# EAGLE board motor_controller_1.0 (EAGLE 9.6.2)
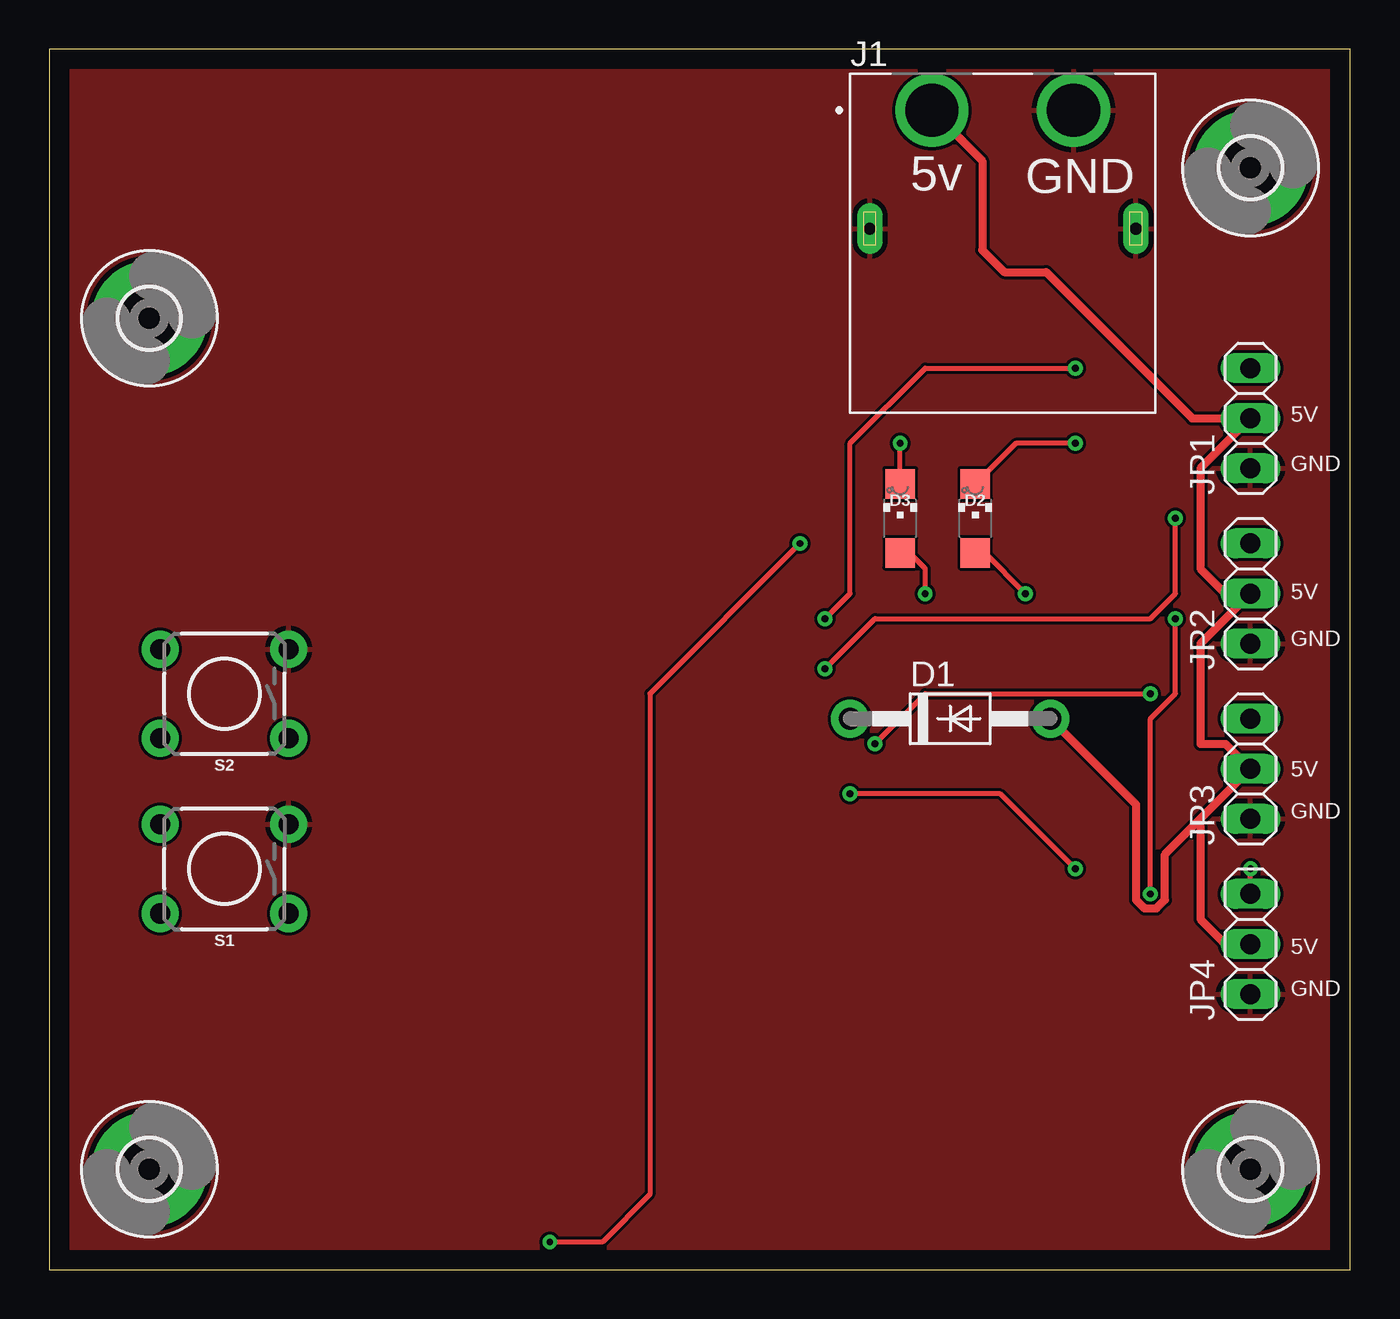
[diagram p0: board, top side]
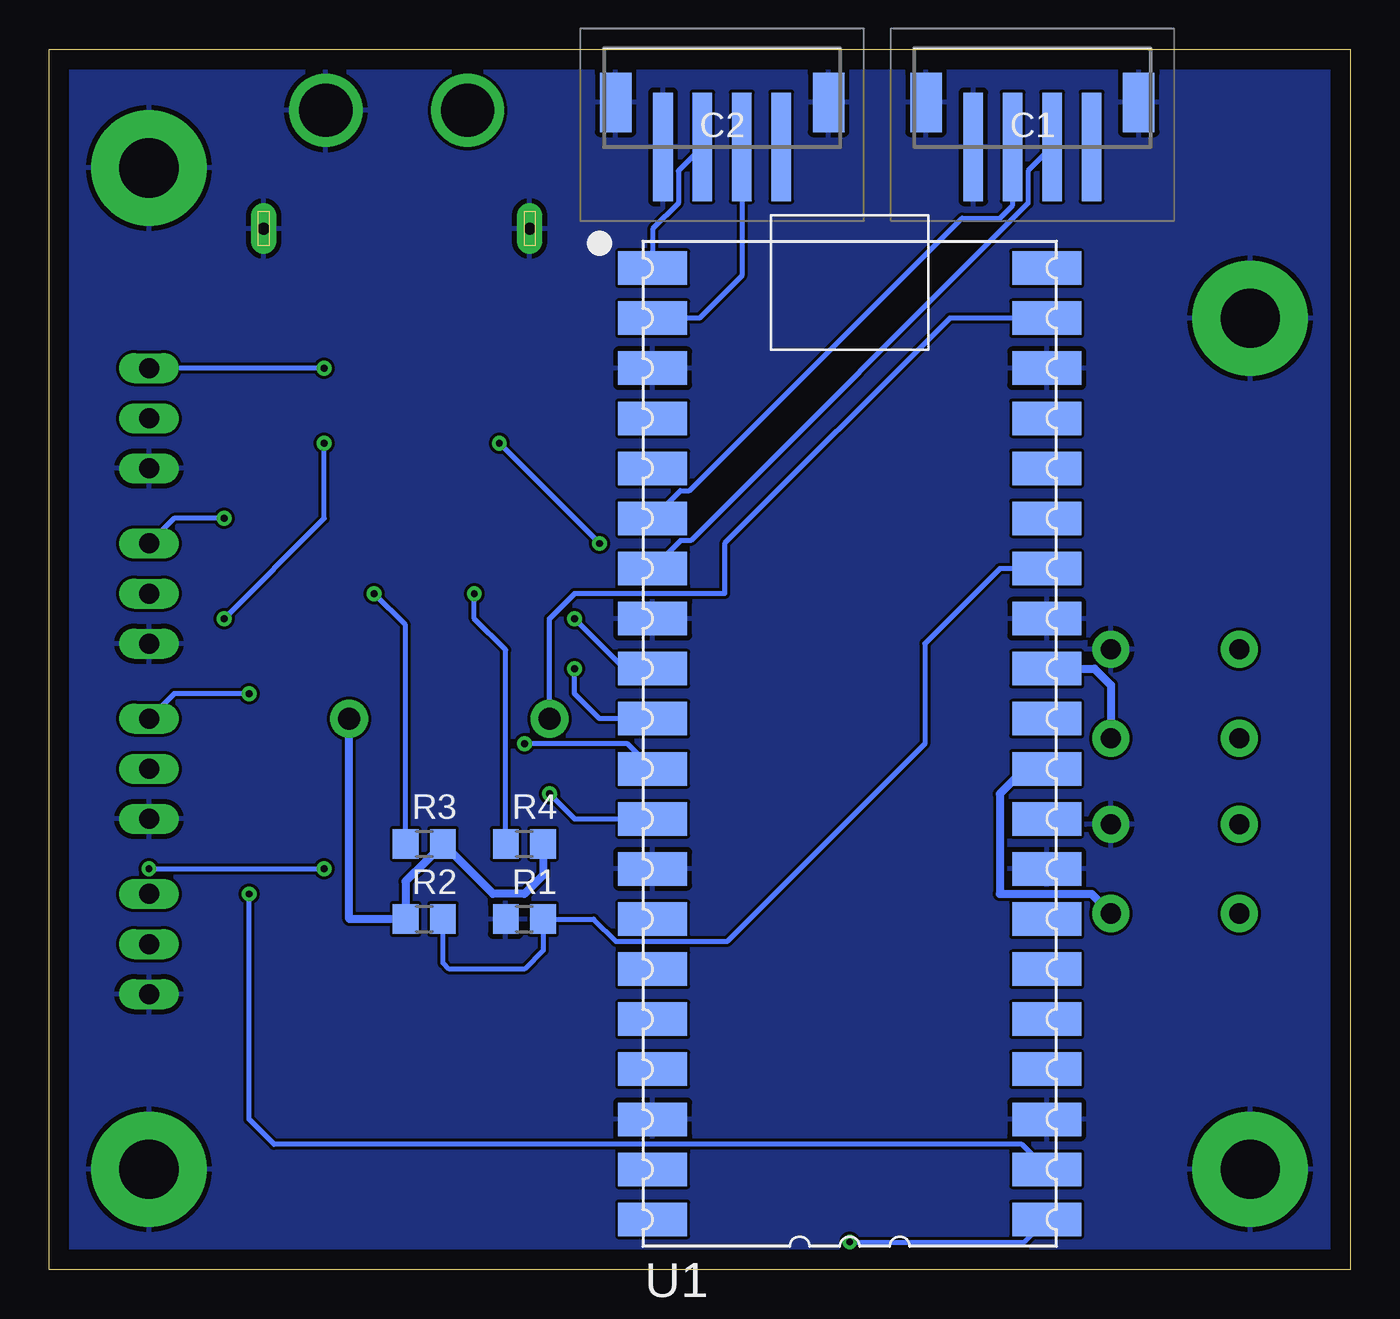
[diagram p1: board, bottom side, seen from below]

Size 66.02 x 61.9 mm. Coordinates in mm from the lower left corner, seen from the top.
Outline: 0,0 66.02,0 66.02,61.9 0,61.9 0,0
Copper layers (1*16): Top 0.035mm / dielectric 1.5mm / Bottom 0.035mm
Design rules "default": minimum track width 6mil, minimum drill 0.35mm, track to track 6mil, track to pad 6mil, pad to pad 6mil, via to via 6mil, smd to smd 6mil, copper to edge 40mil, drill to drill 6mil, minimum pad ring 10mil, minimum via ring 8mil, stop-mask expansion 4mil, vias tented up to drill 0mil, thermal gap 10mil

## Footprints (pad centres in the part's own frame; a part is rotated, then mirrored left to right if it is on the bottom)
4392 = smd 1 x 5.5: 1 3,3.5; 2 1,3.5; 3 -1,3.5; 4 -3,3.5 | smd 1.6 x 3: MP1 5.4,1.25; MP2 -5.4,1.25
DO41-10 = drill 1.118 pad 1.93: A 5.08,0; C -5.08,0
CHIPLED_1206 = smd 1.5 x 1.5: A 0,-1.75; C 0,1.75
3,0-PAD = drill 3 pad 5.842: B3,0 0,0
AMASS_XT60PW-F = drill 2.7: 1 -3.6,0; 2 3.6,0 | drill 0.6 pad 1.3 long: S1 -6.75,-6; S2 6.75,-6
1X03 = drill 1.016 long: 1 -2.54,0; 2 0,0; 3 2.54,0
R0805 = smd 1.3 x 1.5: 1 -0.95,0; 2 0.95,0
TACTILE_SWITCH_PTH_6.0MM = drill 1.016 pad 1.88: 1 -3.251,2.261; 2 3.251,2.261; 3 -3.251,-2.261; 4 3.251,-2.261
PICO-PKG-NO_DEBUG = smd 3.5 x 1.7: P$1 -8.73,25.4; P$2 -8.73,22.86; P$3 -8.73,20.32; P$4 -8.73,17.78; P$5 -8.73,15.24; P$6 -8.73,12.7; P$7 -8.73,10.16; P$8 -8.73,7.62; P$9 -8.73,5.08; P$10 -8.73,2.54; P$11 -8.73,0; P$12 -8.73,-2.54; P$13 -8.73,-5.08; P$14 -8.73,-7.62; P$15 -8.73,-10.16; P$16 -8.73,-12.7; P$17 -8.73,-15.24; P$18 -8.73,-17.78; P$19 -8.73,-20.32; P$20 -8.73,-22.86; P$21 11.27,-22.86; P$22 11.27,-20.32; P$23 11.27,-17.78; P$24 11.27,-15.24; P$25 11.27,-12.7; P$26 11.27,-10.16; P$27 11.27,-7.62; P$28 11.27,-5.08; P$29 11.27,-2.54; P$30 11.27,0; P$31 11.27,2.54; P$32 11.27,5.08; P$33 11.27,7.62; P$34 11.27,10.16; P$35 11.27,12.7; P$36 11.27,15.24; P$37 11.27,17.78; P$38 11.27,20.32; P$39 11.27,22.86; P$40 11.27,25.4

## Placement (x,y rotation side)
C1  4392  [4392]  16.13,60.45 180 bottom
C2  4392  [4392]  31.88,60.45 180 bottom
D1  1N4004  [DO41-10]  45.72,27.94 0 top
D2  [CHIPLED_1206]  46.99,38.1 0 top
D3  [CHIPLED_1206]  43.18,38.1 0 top
H1  MOUNT-PAD-ROUND3.0  [3,0-PAD]  5.08,48.26 0 top
H2  MOUNT-PAD-ROUND3.0  [3,0-PAD]  5.08,5.08 0 top
H3  MOUNT-PAD-ROUND3.0  [3,0-PAD]  60.96,5.08 0 top
H4  MOUNT-PAD-ROUND3.0  [3,0-PAD]  60.96,55.88 0 top
J1  XT60PW-F  [AMASS_XT60PW-F]  48.39,58.8 0 top
JP1  [1X03]  60.96,43.18 90 top
JP2  [1X03]  60.96,34.29 90 top
JP3  [1X03]  60.96,25.4 90 top
JP4  [1X03]  60.96,16.51 90 top
R1  100k  [R0805]  41.91,17.78 0 bottom
R2  100k  [R0805]  46.99,17.78 0 bottom
R3  [R0805]  46.99,21.59 0 bottom
R4  [R0805]  41.91,21.59 0 bottom
S1  MOMENTARY-SWITCH-SPST-PTH-6.0MM  [TACTILE_SWITCH_PTH_6.0MM]  8.89,20.32 180 top
S2  MOMENTARY-SWITCH-SPST-PTH-6.0MM  [TACTILE_SWITCH_PTH_6.0MM]  8.89,29.21 180 top
U1  [PICO-PKG-NO_DEBUG]  26.67,25.4 0 bottom

## Library data of the parts
C1 C2 = 4392; DESCRIPTION: Adafruit Accessories JST PH 4-pin Horizontal Connector (10-pack) - STEMMA; HEIGHT: 6.85mm; MANUFACTURER_NAME: Adafruit; MANUFACTURER_PART_NUMBER: 4392; MOUSER_PART_NUMBER: 485-4392; MOUSER_PRICE-STOCK: https://www.mouser.co.uk/ProductDetail/Adafruit/4392?qs=xZ%2FP%252Ba9zWqbG2TKb%252Bnxciw%3D%3D
D1 = adafruit
D2 D3 = led
H1-H4 = holes
J1 = XT60PW-F; AVAILABILITY: Not in stock; CHECK_PRICES: https://www.snapeda.com/parts/XT60PW-F/AMASS/view-part/?ref=eda; MF: AMASS; MP: XT60PW-F; PACKAGE: Package; PRICE: None; SNAPEDA_LINK: https://www.snapeda.com/parts/XT60PW-F/AMASS/view-part/?ref=snap
JP1-JP4 = pinhead
R1-R4 = rcl; SPICEPREFIX: R
S1 S2 = SparkFun-Switches; PROD_ID: SWCH-08441; SF_SKU: COM-00097
U1 = RpiPico

## Nets
3V3(OUT): U1.P$36
5V: D1.A J1.1 JP1.2 JP2.2 JP3.2 JP4.2 R2.1 R3.2 R4.2
GND: C1.1 C1.MP1 C1.MP2 C2.1 C2.MP1 C2.MP2 H1.B3,0 H2.B3,0 H3.B3,0 H4.B3,0 J1.2 J1.S1 J1.S2 JP1.1 JP2.1 JP3.1 JP4.1 R1.1 S1.3 S2.3 U1.P$3 U1.P$8 U1.P$13 U1.P$18 U1.P$23 U1.P$28 U1.P$33 U1.P$38
N$1: D1.C U1.P$39
N$2: S1.1 U1.P$30
N$3: S2.1 U1.P$32
N$4: R1.2 R2.2 U1.P$34
N$5: D2.C U1.P$22
N$6: D3.C U1.P$21
N$7: D2.A R3.1
N$8: D3.A R4.1
SCL0: C1.3 U1.P$7
SDA0: C1.2 U1.P$6
SER_RX: C2.3 U1.P$2
SER_TX: C2.2 U1.P$1
SERVO1: JP1.3 U1.P$9
SERVO2: JP2.3 U1.P$10
SERVO3: JP3.3 U1.P$11
SERVO4: JP4.3 U1.P$12
VBUS: U1.P$40

## Tracks (layer width: path | path; a pad name or v marks a point on that pad's centre or on a via)
5V
  Top 0.406: J1.1 47.35,56.24 47.35,51.71 48.47,50.59 50.59,50.59 58,43.18 JP1.2 58.42,40.64 58.42,35.56 59.69,34.29 JP2.2 58.42,31.75 58.42,26.67 59.69,26.67 JP3.2 | JP3.2 58.42,22.86 58.42,17.78 59.69,16.51 JP4.2 | JP3.2 56.61,21.05 56.61,18.75 56.18,18.32 55.58,18.32 55.15,18.75 55.15,23.59 D1.A
  Bottom 0.406: R4.2 40.96,20 41.91,19.05 43.5,19.05 R3.2 46.93,20.7 46.93,20.69 47.94,19.69 R2.1 50.8,17.78 D1.A
GND
  pour Top: -7.62,68.58 -7.62,2.54 1.27,-6.35 67.31,-6.35 73.66,0 73.66,62.23 67.31,68.58
  pour Bottom: -6.35,69.85 -3.81,67.31 -3.81,-2.54 2.54,-8.89 33.02,-8.89 77.47,-8.89 81.28,-5.08 81.28,64.77 74.93,71.12 -5.08,71.12
N$1
  Bottom 0.254: U1.P$39 20.32,48.26 31.75,36.83 31.75,34.29 39.37,34.29 40.64,33.02 D1.C
N$2
  Bottom 0.406: S1.1 13.13,19.05 17.78,19.05 17.78,24.13 16.51,25.4 U1.P$30
N$3
  Bottom 0.406: U1.P$32 12.98,30.48 12.14,29.64 S2.1
N$4
  Bottom 0.254: U1.P$34 17.78,35.56 21.59,31.75 21.59,26.67 31.61,16.65 37.27,16.65 38.4,17.78 R1.2 40.96,16.19 41.91,15.24 45.72,15.24 46.04,15.56 R2.2
N$5  (via drill 0.35)
  Top 0.254: v55.88,19.05 55.88,27.94 57.15,29.21 v57.15,33.02 | D2.C 49.05,41.91 v52.07,41.91
  Bottom 0.254: U1.P$22 16.67,6.35 54.61,6.35 55.88,7.62 v55.88,19.05 | v57.15,33.02 52.07,38.1 v52.07,41.91
N$6  (via drill 0.35)
  Top 0.254: D3.C v43.18,41.91 | v38.1,36.83 30.48,29.21 30.48,3.81 28.06,1.39 v25.4,1.39
  Bottom 0.254: v43.18,41.91 v38.1,36.83 | v25.4,1.39 16.55,1.39 U1.P$21
N$7  (via drill 0.35)
  Top 0.254: v49.53,34.29 47.47,36.35 D2.A
  Bottom 0.254: R3.1 47.94,32.7 v49.53,34.29
N$8  (via drill 0.35)
  Top 0.254: v44.45,34.29 44.45,35.56 43.66,36.35 D3.A
  Bottom 0.254: R4.1 42.86,31.43 44.45,33.02 v44.45,34.29
SCL0
  Bottom 0.254: C1.3 16.35,55.73 16.35,54.09 33.47,36.97 33.99,36.97 U1.P$7
SDA0
  Bottom 0.254: U1.P$6 33.99,39.51 33.53,39.51 19.7,53.34 17.78,53.34 17.13,53.99 C1.2
SER_RX
  Bottom 0.254: C2.3 30.88,50.4 33.02,48.26 U1.P$2
SER_TX
  Bottom 0.254: C2.2 34.1,55.73 34.1,54.09 35.4,52.78 U1.P$1
SERVO1  (via drill 0.35)
  Top 0.254: v39.37,33.02 40.64,34.29 40.64,41.91 44.45,45.72 v52.07,45.72
  Bottom 0.254: U1.P$9 36.83,30.48 v39.37,33.02 | v52.07,45.72 JP1.3
SERVO2  (via drill 0.35)
  Top 0.254: v39.37,30.48 41.91,33.02 55.88,33.02 57.15,34.29 v57.15,38.1
  Bottom 0.254: U1.P$10 38.1,27.94 39.37,29.21 v39.37,30.48 | v57.15,38.1 59.69,38.1 JP2.3
SERVO3  (via drill 0.35)
  Top 0.254: v41.91,26.67 44.45,29.21 v55.88,29.21
  Bottom 0.254: U1.P$11 36.67,26.67 v41.91,26.67 | v55.88,29.21 59.69,29.21 JP3.3
SERVO4  (via drill 0.35)
  Top 0.254: JP4.3 v60.96,20.32 | v52.07,20.32 48.26,24.13 v40.64,24.13
  Bottom 0.254: v60.96,20.32 v52.07,20.32 | v40.64,24.13 39.37,22.86 U1.P$12

## Text on the board
tNames: 5v | GND | 5V | GND | 5V | GND | 5V | GND | 5V | GND